# EAGLE board test (EAGLE 7.6.0)
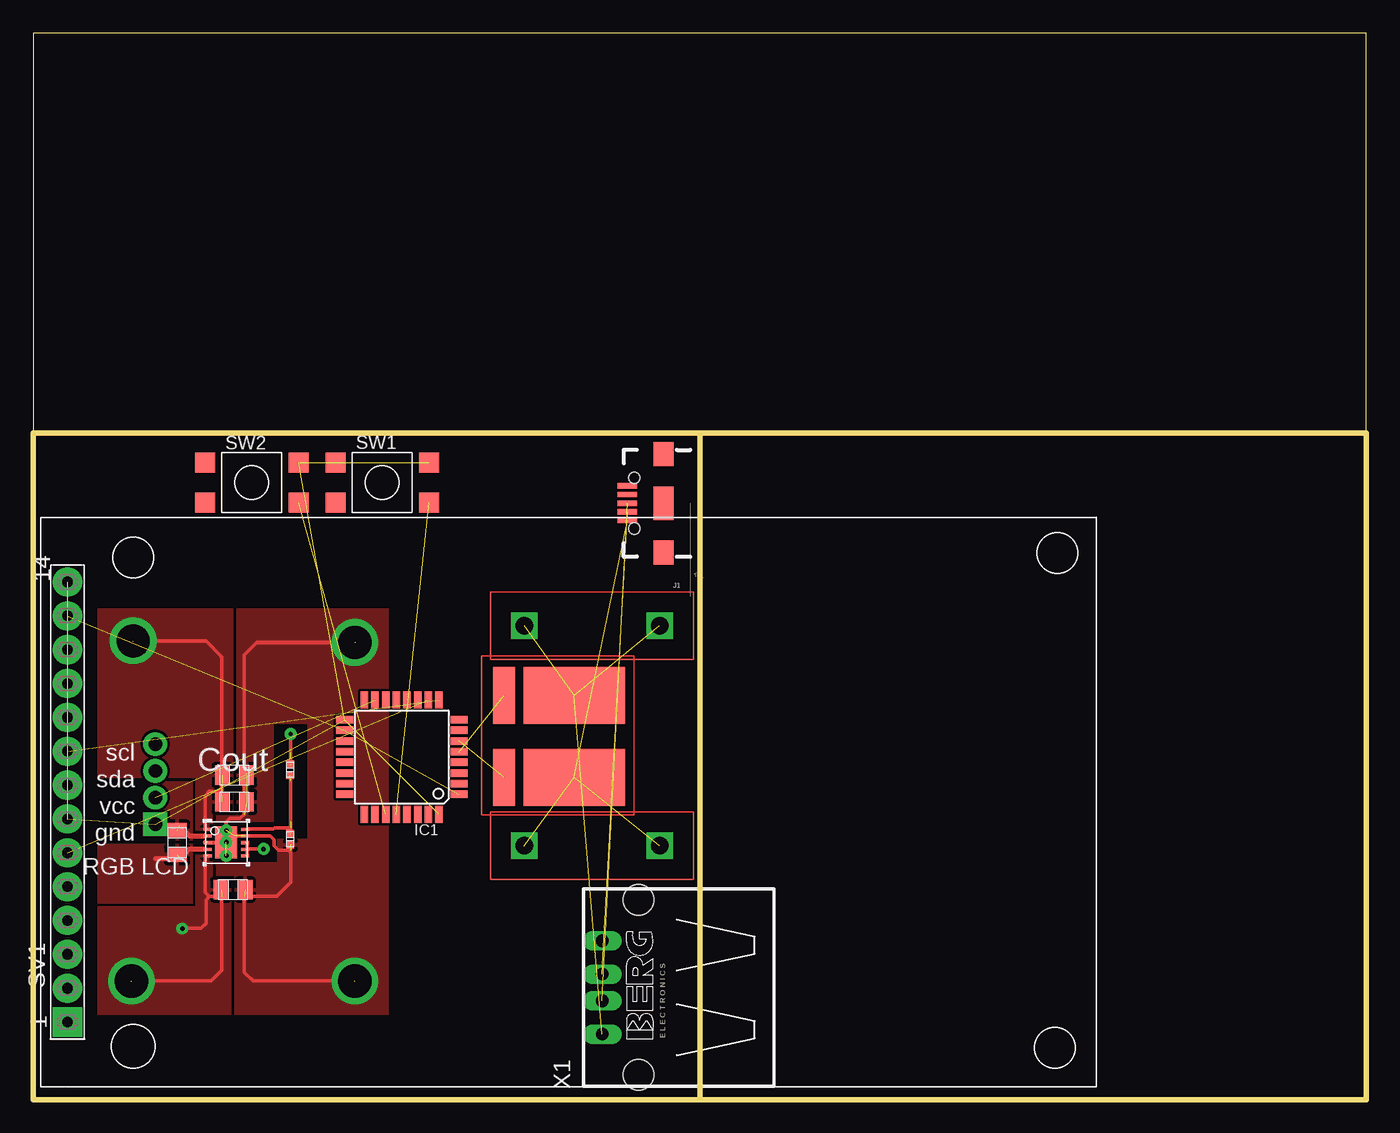
[diagram p0: board, top side]
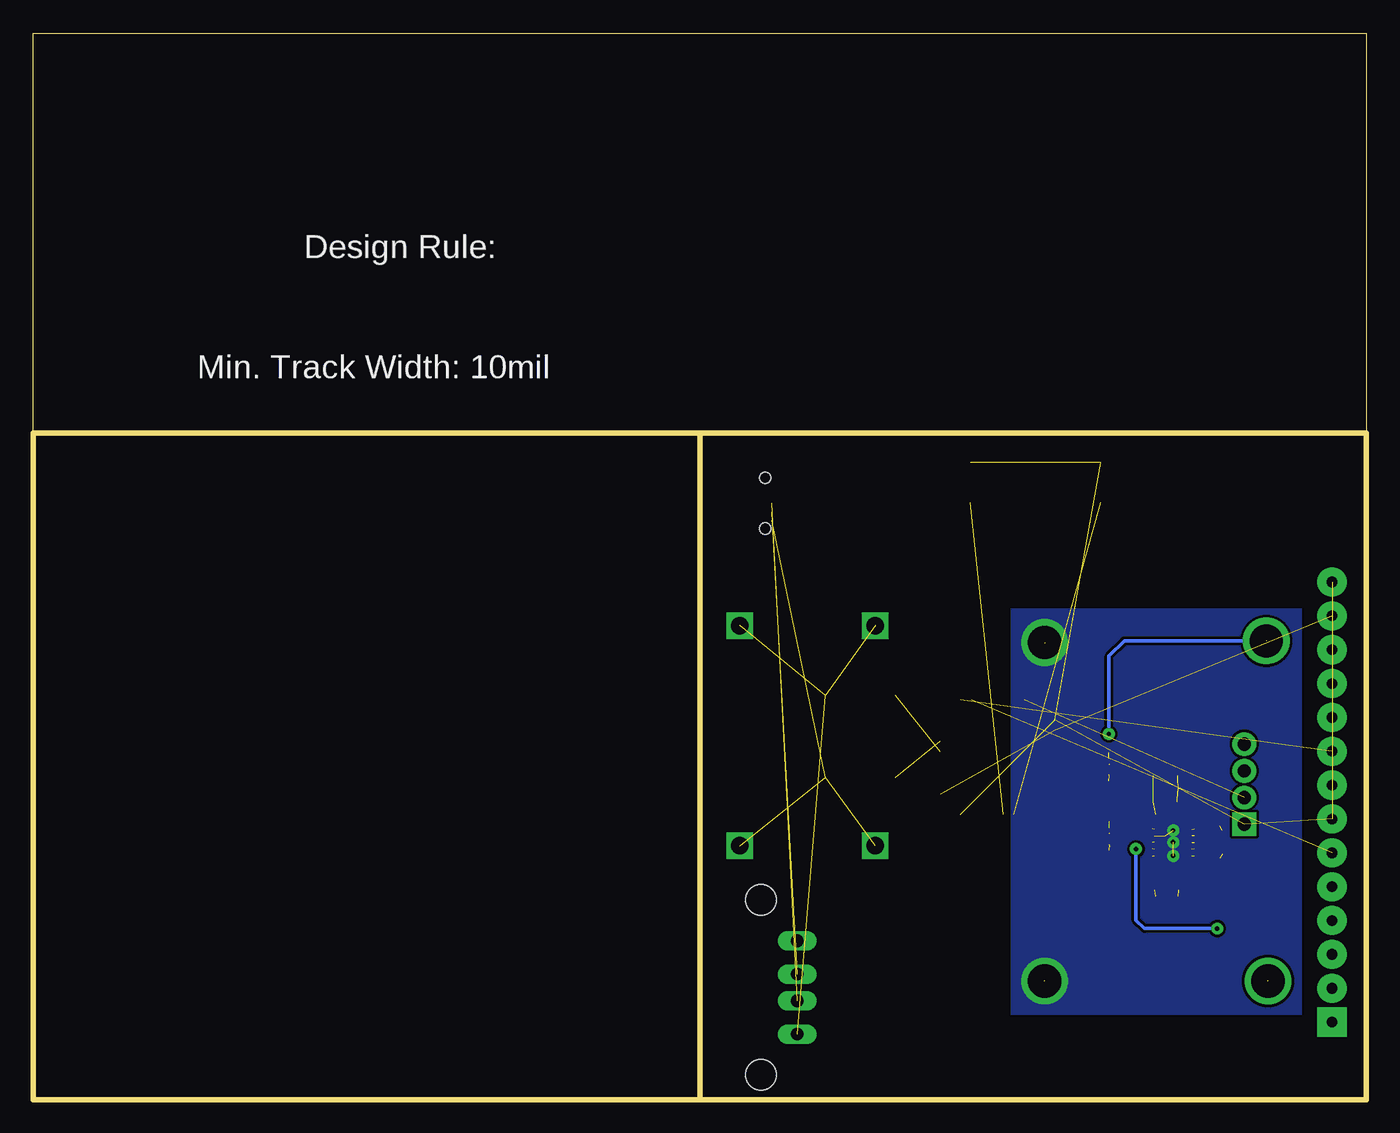
[diagram p1: board, bottom side, seen from below]

Size 100 x 80 mm. Coordinates in mm from the lower left corner, seen from the top.
Outline: 100,50 100,80 0,80 0,50
Outline: 0,50 0,0 50,0
Outline: 0,50 50,50
Outline: 50,50 50,0
Outline: 50,50 100,50
Outline: 100,50 100,0 50,0
Copper layers ((1*2)+(15*16)): TOP 0.035mm / dielectric 1.5mm / INTERNAL1 0.035mm / dielectric 0.15mm / layer 15 0.035mm / dielectric 0.2mm / BOTTOM 0.035mm
Design rules "custom": minimum track width 10mil, minimum drill 0.6mm, track to track 8mil, track to pad 8mil, pad to pad 8mil, via to via 8mil, smd to smd 8mil, copper to edge 40mil, drill to drill 8mil, minimum pad ring 10mil, minimum via ring 8mil, stop-mask expansion 4mil, vias tented up to drill 0mil, thermal gap 10mil

## Footprints (pad centres in the part's own frame; a part is rotated, then mirrored left to right if it is on the bottom)
0805 = smd 1.118 x 1.448: 1 -0.902,0; 2 0.902,0
BANANA_PLUG = drill 1.321 square: P$1 -5.08,0; P$2 5.08,0
TP-1502 = drill 0.813: 1 0,0
TQFP32-08 = smd 1.27 x 0.559: 1 -4.293,2.8; 2 -4.293,2; 3 -4.293,1.2; 4 -4.293,0.4; 5 -4.293,-0.4; 6 -4.293,-1.2; 7 -4.293,-2; 8 -4.293,-2.8; 17 4.293,-2.8; 18 4.293,-2; 19 4.293,-1.2; 20 4.293,-0.4; 21 4.293,0.4; 22 4.293,1.2; 23 4.293,2; 24 4.293,2.8 | smd 0.559 x 1.27: 9 -2.8,-4.293; 10 -2,-4.293; 11 -1.2,-4.293; 12 -0.4,-4.293; 13 0.4,-4.293; 14 1.2,-4.293; 15 2,-4.293; 16 2.8,-4.293; 25 2.8,4.293; 26 2,4.293; 27 1.2,4.293; 28 0.4,4.293; 29 -0.4,4.293; 30 -1.2,4.293; 31 -2,4.293; 32 -2.8,4.293
USB-B-MICRO-SMD_V03 = smd 1.45 x 0.4: D+ 2.725,0; D- 2.725,0.65; GND 2.725,-1.3; ID 2.725,-0.65; VBUS 2.725,1.3 | smd 1.5 x 1.8: SHIELD1 0,3.685; SHIELD2 0,-3.685 | smd 1.5 x 2.5: SHIELD3 0,0 | hole 0.85: 2.2,1.9; 2.2,-1.9
0402 = smd 0.559 x 0.61: 1 -0.419,0; 2 0.419,0
FE15 = drill 0.8 pad 2.184 square: P$1 0,0 | drill 0.8 pad 2.184: P$2 0,2.54; P$3 0,5.08; P$4 0,7.62; P$5 0,10.16; P$6 0,12.7; P$7 0,15.24; P$8 0,17.78; P$9 0,20.32; P$10 0,22.86; P$11 0,25.4; P$12 0,27.94; P$13 0,30.48; P$14 0,33.02
BT4.5X4.5 = smd 1.5 x 1.5: P -3.5,1.5; P1 3.5,1.5; S -3.5,-1.5; S1 3.5,-1.5
DRC0010J = smd 0.6 x 0.24: 1 -1.4,1; 2 -1.4,0.5; 3 -1.4,0; 4 -1.4,-0.5; 5 -1.4,-1; 6 1.4,-1; 7 1.4,-0.5; 8 1.4,0; 9 1.4,0.5; 10 1.4,1 | smd 1.65 x 2.4: 11 0,0
RGB_LCD = drill 1 pad 1.778: P$1 0,-4; P$3 0,-6; P$4 0,-2 | drill 1 pad 1.778 square: P$2 0,0
RESISTOR_4PIN = smd 4.27 x 7.62: I_IN -4.02,-1.88; I_OUT 2.13,-1.88 | smd 4.27 x 1.68: V+ -4.02,3.38; V- 2.13,3.38
PN87520 = drill 0.95 long: 1 -3.5,2.71; 2 -1,2.71; 3 1,2.71; 4 3.5,2.71 | hole 2.3: -6.57,0; 6.57,0

## Placement (x,y rotation side)
CIN  [0805]  14.99,15.75 0 top
COUT_1  [0805]  15.09,22.33 0 top
COUT_2  [0805]  15.09,24.33 0 top
E$1  [BANANA_PLUG]  41.91,19.05 0 top
E$2  [BANANA_PLUG]  41.91,35.56 0 top
GND  [TP-1502]  24.1,8.86 0 top
GND1  [TP-1502]  24.1,34.26 0 top
IC1  ATXMEGA32AA  [TQFP32-08]  27.64,25.7 180 top
J1  USB-MICROB"  [USB-B-MICRO-SMD_V03]  47.29,44.74 180 top
L1  [0805]  10.79,19.28 90 top
RFBB  [0402]  19.28,19.53 270 top
RFBT  [0402]  19.28,24.74 270 top
SV1  [FE15]  2.56,5.81 0 top
SW1  [BT4.5X4.5]  26.19,46.31 0 top
SW2  [BT4.5X4.5]  16.39,46.28 0 top
U1  [DRC0010J]  14.48,19.28 0 top
U$1  4PIN_GROVE_CONNECTORUNIVERSAL_4_PIN_CONNECTOR  [RGB_LCD]  9.15,20.66 180 top
U$2  RESISTOR_4PIN  [RESISTOR_4PIN]  38.7,28.2 90 top
VIN  [TP-1502]  7.34,8.86 0 top
VOUT  [TP-1502]  7.47,34.42 0 top
X1  [PN87520]  45.39,8.41 90 top

## Library data of the parts
CIN = ultra-librarian; REFDES: Cin; TYPE: LMK212BJ106KG-T
COUT_1 COUT_2 = ultra-librarian
E$1 E$2 U$1 U$2 = Tft_lcd_header
GND = ultra-librarian; REFDES: GND; TYPE: TP-1502
GND1 = ultra-librarian; REFDES: GND1; TYPE: TP-1502
IC1 SV1 = Tft_lcd_header; OC_FARNELL: unknown; OC_NEWARK: unknown
J1 = SparkFun-Connectors; PROD_ID: CONN-11752
L1 = ultra-librarian; REFDES: L1; TYPE: LQM21PN1R5MC0D
RFBB = ultra-librarian; REFDES: Rfbb; TYPE: CRCW0402178KFKED
RFBT = ultra-librarian; REFDES: Rfbt; TYPE: CRCW04021M00FKED
SW1 SW2 = buttons
U1 = ultra-librarian; REFDES: U1; TYPE: TPS63000DRCR
VIN = ultra-librarian; REFDES: VIN; TYPE: TP-1502
VOUT = ultra-librarian; REFDES: VOUT; TYPE: TP-1502
X1 = con-berg; OC_FARNELL: unknown; OC_NEWARK: unknown

## Nets
0: CIN.2 COUT_1.2 COUT_2.2 GND1.1 GND.1 RFBB.2 U1.3 U1.9 U1.11
3: RFBB.1 RFBT.2 U1.10
6: COUT_1.1 COUT_2.1 RFBT.1 U1.1 VOUT.1
7: L1.1 U1.4
10: L1.2 U1.2
11: CIN.1 U1.5 U1.6 U1.7 U1.8 VIN.1
+3V3: IC1.17 IC1.32 SV1.P$7 SV1.P$14 SW1.P1 SW2.P1 U$1.P$2
GND: IC1.1 IC1.18 SV1.P$13
N$1: IC1.9 SV1.P$9
N$2: SV1.P$8
N$3: IC1.10 SV1.P$6
N$4: IC1.15 U$1.P$4
N$5: U$1.P$3
N$6: X1.4
N$7: J1.D+ X1.2
N$8: J1.D- X1.3
N$9: IC1.27 SW2.S1
N$10: IC1.28 SW1.S1
N$11: U$1.P$1
N$12: E$1.P$1 E$1.P$2 J1.VBUS U$2.I_IN
N$13: E$2.P$1 E$2.P$2 U$2.I_OUT X1.1
N$14: IC1.6 U$2.V+
N$15: IC1.5 U$2.V-

## Tracks (layer width: path | path; a pad name or v marks a point on that pad's centre or on a via)
0  (via drill 0.33 pad 0.89, 2.49 pad 3.48)  (12 unrouted)
  TOP 0.254: v14.48,20.19 14.48,20.83 14.73,21.08 15.49,21.08 15.82,21.41 15.82,33.35 16.76,34.29 v24.13,34.29 | v14.48,19.3 15.11,19.3 15.11,19.79 17.78,19.79 18.09,19.48 18.09,19.05 18.41,18.69 19.3,18.69 19.3,16.28 18.26,15.24 15.82,15.24 15.82,9.55 16.51,8.89 v24.13,8.89 | 19.29,18.21 19.29,19.15
  TOP 0.305: 12.88,19.3 v14.48,19.3
  other vias: 14.48,18.29
  pour TOP (rank 6): 13.72,19.3 15.24,19.3 15.24,17.78 18.29,17.78 18.29,19.56 20.57,19.56 20.57,28.19 18.03,28.19 18.03,20.83 15.24,20.83 15.24,19.43 13.72,19.43 13.72,21.34 15.24,21.34 15.24,36.83 26.67,36.83 26.67,6.35 15.11,6.35 15.11,16.76 13.72,16.76
  pour BOTTOM (rank 5): 4.83,36.83 26.67,36.83 26.67,6.35 4.83,6.35
3  (5 unrouted)
  TOP 0.254: 19.3,23.9 19.3,20.4 18.11,20.4 18.01,20.3 16.05,20.3 | 19.29,19.91 19.29,20.85 | 19.29,23.42 19.29,24.36
6  (via drill 0.33 pad 0.89, 2.49 pad 3.48)  (6 unrouted)
  TOP 0.254: v7.49,34.42 12.95,34.42 14.12,33.22 14.12,23.11 13.21,23.11 12.88,22.78 12.88,20.3 | 19.3,25.6 v19.3,27.43 | 19.29,25.12 19.29,26.06
  BOTTOM 0.254: v19.3,27.43 19.3,33.27 18.16,34.42 v7.49,34.42
  pour TOP (rank 4): 12.19,20.19 13.46,20.19 13.46,21.59 14.99,21.59 14.99,36.83 4.83,36.83 4.83,24.13 12.19,24.13
7  (2 unrouted)
  TOP 0.381: 9.14,18.09 10.97,18.09 11.68,18.8 12.88,18.8
  pour TOP: 11.94,19.18 4.83,19.18 4.83,14.73 11.94,14.73
10  (2 unrouted)
  TOP 0.381: 12.88,19.79 11.68,19.79 10.97,20.52 9.14,20.52
  pour TOP (rank 2): 11.94,19.43 11.94,23.88 4.83,23.88 4.83,19.43
11  (via drill 0.33 pad 0.89, 2.49 pad 3.48)  (6 unrouted)
  TOP 0.254: v11.18,12.83 12.57,12.83 12.95,13.21 12.95,14.99 13.21,15.24 | 13.21,15.24 12.88,15.54 12.88,18.29 | 13.21,15.24 14.12,15.24 14.12,9.68 13.34,8.89 v7.37,8.89 | 16.05,18.8 v17.27,18.8 | 16.05,18.29 16.05,18.8 | 16.05,18.8 16.05,19.3
  BOTTOM 0.254: v17.27,18.8 17.27,13.46 16.64,12.83 v11.18,12.83
  pour TOP (rank 3): 12.19,18.41 13.46,18.41 13.46,16.51 14.86,16.51 14.86,6.35 4.83,6.35 4.83,14.48 12.19,14.48
+3V3  (6 unrouted)
GND  (2 unrouted)
N$1  (1 unrouted)
N$3  (1 unrouted)
N$4  (1 unrouted)
N$7  (1 unrouted)
N$8  (1 unrouted)
N$9  (1 unrouted)
N$10  (1 unrouted)
N$12  (3 unrouted)
N$13  (3 unrouted)
N$14  (1 unrouted)
N$15  (1 unrouted)

## Text on the board
tDocu: Cout
bDocu: Design Rule: | Min. Track Width: 10mil | Min. Clearance: 10mil